# EAGLE board Magnificent Amur-Borwo (EAGLE 9.7.0)

Size 400.21 x 291.04 mm. Coordinates in mm from the lower left corner, seen from the top.
Outline: 0,0 400.21,0 400.21,291.04 0,291.04 0,0
Copper layers (1*16): Top 0.035mm / dielectric 1.5mm / Bottom 0.035mm
Design rules "default": minimum track width 6mil, minimum drill 0.35mm, track to track 6mil, track to pad 6mil, pad to pad 6mil, via to via 6mil, smd to smd 6mil, copper to edge 40mil, drill to drill 6mil, minimum pad ring 10mil, minimum via ring 8mil, stop-mask expansion 4mil, vias tented up to drill 0mil, thermal gap 10mil

## Footprints (pad centres in the part's own frame; a part is rotated, then mirrored left to right if it is on the bottom)
BATTERY-GENERIC = drill 1.118 pad 3.15 octagon: + 2.54,0; - -2.54,0
LEDRD254W60D565H860B = drill 0.981 pad 1.581: 1 -1.27,0; 2 1.27,0
LED-RGB-5MM = drill 0.9: B 0.635,0.635; C -0.635,-0.635; G 1.905,-0.635; R -1.905,0.635
LEDRD254W60D565H860B_B = drill 0.981 pad 1.581: 1 -1.27,0; 2 1.27,0
LEDRD254W60D565H860B_G = drill 0.981 pad 1.581: 1 -1.27,0; 2 1.27,0
MOTOR = drill 1.118 pad 3.15 octagon: + 2.54,0; - -2.54,0
PIEZO = drill 1 pad 1.6: 1 -3.5,0; 2 3.5,0
GL5528 = drill 0.8 pad 1.4: 1 -1.702,0; 2 1.702,0
RESAD1016W63L850D250B = drill 0.83 pad 1.43: 1 -5.08,0; 2 5.08,0
HA-06-SM065 = drill 1 pad 1.676: 1 -2.54,-2.54; 2 0,2.54; 3 2.54,-2.54
SWITCH-MOMENTARY-PTH-6.5MM = drill 1.016 pad 1.88: 1 -3.251,2.261; 2 3.251,2.261; 3 -3.251,-2.261; 4 3.251,-2.261
SG90 = drill 1.016 long: 1 -2.54,0; 2 0,0; 3 2.54,0
ARDUINO-UNO-R3-SHIELD = drill 1.016 pad 1.88: 3.3V 24.13,-2.54; 5V 24.13,0; A0 24.13,12.7; A1 24.13,15.24; A2 24.13,17.78; A3 24.13,20.32; A4 24.13,22.86; A5 24.13,25.4; AREF -24.13,-13.97; D2 -24.13,20.32; D3 -24.13,17.78; D4 -24.13,15.24; D5 -24.13,12.7; D6 -24.13,10.16; D7 -24.13,7.62; D8 -24.13,3.81; D9 -24.13,1.27; D10 -24.13,-1.27; D11 -24.13,-3.81; D12 -24.13,-6.35; D13 -24.13,-8.89; GND@0 24.13,2.54; GND@1 24.13,5.08; GND@2 -24.13,-11.43; IOREF 24.13,-7.62; NC 24.13,-10.16; RES 24.13,-5.08; RX -24.13,25.4; SCL -24.13,-19.05; SDA -24.13,-16.51; TX -24.13,22.86; VIN 24.13,7.62
JHD-162A = drill 1.016 long: 1 -19.05,0; 2 -16.51,0; 3 -13.97,0; 4 -11.43,0; 5 -8.89,0; 6 -6.35,0; 7 -3.81,0; 8 -1.27,0; 9 1.27,0; 10 3.81,0; 11 6.35,0; 12 8.89,0; 13 11.43,0; 14 13.97,0; 15 16.51,0; 16 19.05,0
TO92 = drill 0.813 octagon: 1 -1.27,0; 2 0,1.905; 3 1.27,0

## Placement (x,y rotation side)
BAT3  9V  [BATTERY-GENERIC]  272.37,8.26 180 top
D1  RED  [LEDRD254W60D565H860B]  162.94,226.4 180 top
D2  LED-RGBRCBG-PTH  [LED-RGB-5MM]  22.52,283.55 0 top
D3  RED  [LEDRD254W60D565H860B]  9.53,261.25 180 top
D4  BLUE  [LEDRD254W60D565H860B_B]  23.17,260.99 180 top
D5  GREEN  [LEDRD254W60D565H860B_G]  37.09,261.12 180 top
D10  LED-RGBRCBG-PTH  [LED-RGB-5MM]  274.21,57.63 0 top
D11  RED  [LEDRD254W60D565H860B]  261.22,35.33 180 top
D12  BLUE  [LEDRD254W60D565H860B_B]  274.87,35.07 180 top
D13  GREEN  [LEDRD254W60D565H860B_G]  288.78,35.2 180 top
M1  MOTOR_HDR  [MOTOR]  159.8,167.07 0 top
PIEZO1  PIEZO  [PIEZO]  208.07,40.94 180 top
R1  PHOTOCELL_GL5528  [GL5528]  214.82,200.26 330 top
R2  10k  [RESAD1016W63L850D250B]  217.18,184.71 270 top
R4  480  [RESAD1016W63L850D250B]  10.79,256.17 90 top
R5  480  [RESAD1016W63L850D250B]  24.44,255.91 90 top
R6  480  [RESAD1016W63L850D250B]  38.36,256.04 90 top
R7  480  [RESAD1016W63L850D250B]  21.25,278.47 90 top
R8  220  [RESAD1016W63L850D250B]  362.18,145.45 90 top
R9  220  [RESAD1016W63L850D250B]  196.02,219.71 90 top
R14  220  [RESAD1016W63L850D250B]  182.85,60.89 90 top
R15  220  [RESAD1016W63L850D250B]  198.04,61.75 90 top
R16  220  [RESAD1016W63L850D250B]  202.95,62.1 90 top
R17  480  [RESAD1016W63L850D250B]  262.49,30.25 90 top
R18  480  [RESAD1016W63L850D250B]  276.14,29.99 90 top
R19  480  [RESAD1016W63L850D250B]  290.05,30.12 90 top
R20  480  [RESAD1016W63L850D250B]  272.94,52.55 90 top
RPOT1  250k  [HA-06-SM065]  329.96,177.46 0 top
RPOT3  250k  [HA-06-SM065]  279.33,98.61 0 top
S1  SWITCH_MOMENTARY  [SWITCH-MOMENTARY-PTH-6.5MM]  8.26,247.28 90 top
S2  SWITCH_MOMENTARY  [SWITCH-MOMENTARY-PTH-6.5MM]  21.9,247.02 90 top
S3  SWITCH_MOMENTARY  [SWITCH-MOMENTARY-PTH-6.5MM]  35.82,247.15 90 top
S7  SWITCH_MOMENTARY  [SWITCH-MOMENTARY-PTH-6.5MM]  259.95,21.36 90 top
S8  SWITCH_MOMENTARY  [SWITCH-MOMENTARY-PTH-6.5MM]  273.6,21.1 90 top
S9  SWITCH_MOMENTARY  [SWITCH-MOMENTARY-PTH-6.5MM]  287.51,21.23 90 top
SERVO1  SERVOSG90  [SG90]  116.46,197.11 0 top
U1  ARDUINO-UNO-R3-SHIELD  [ARDUINO-UNO-R3-SHIELD]  192.75,111.23 270 top
U2  LCD-16X2JHD-162A  [JHD-162A]  344.58,130.65 0 top
U3  TMP36GT9Z_TO92  [TO92]  183.19,191.83 0 top

## Library data of the parts
BAT3 D2 D10 M1 PIEZO1 R1 R2 R4-R9 R14-R20 RPOT1 RPOT3 S1-S3 S7-S9 SERVO1 U1-U3 = Tinkercad
D1 D3 D11 = Tinkercad; CATEGORY: Opto-Electronic; SUB-CATEGORY: LED; VALUE: LED_RED
D4 D12 = Tinkercad; CATEGORY: Opto-Electronic; SUB-CATEGORY: LED; VALUE: LED_BLUE
D5 D13 = Tinkercad; CATEGORY: Opto-Electronic; SUB-CATEGORY: LED; VALUE: LED_GREEN

## Nets
BAT3+: BAT3.+ S7.1 S8.1 S9.1
BAT3-: BAT3.- D11.2 D12.2 D13.2 R20.1
D1_A: D1.1 R9.2
D2_C: D2.C R7.2
D3_A: D3.1 R4.2
D4_A: D4.1 R5.2
D5_A: D5.1 R6.2
D5_C: D3.2 D4.2 D5.2 R7.1
D11_A: D11.1 R17.2
D12_A: D12.1 R18.2
D13_A: D13.1 R19.2
S1_3: D2.R R4.1 S1.3 S1.4
S2_1: S1.1 S2.1 S3.1
S2_3: D2.B R5.1 S2.3 S2.4
S3_3: D2.G R6.1 S3.3 S3.4
S7_3: D10.R R16.1 R17.1 S7.3 S7.4
S8_3: D10.B R14.1 R18.1 S8.3 S8.4
S9_3: D10.G R15.1 R19.1 S9.3 S9.4
U1_5V: R1.1 R8.2 RPOT1.1 RPOT3.1 SERVO1.2 U1.5V U2.2 U3.3
U1_A0: U1.A0 U3.2
U1_A1: R1.2 R2.1 U1.A1
U1_A2: RPOT3.2 U1.A2
U1_A3: PIEZO1.1 U1.A3
U1_D2: U1.D2 U2.14
U1_D3: U1.D3 U2.13
U1_D4: U1.D4 U2.12
U1_D5: U1.D5 U2.11
U1_D6: R16.2 U1.D6
U1_D7: R15.2 U1.D7
U1_D8: R9.1 U1.D8
U1_D9: M1.- U1.D9
U1_D10: SERVO1.3 U1.D10
U1_D11: U1.D11 U2.6
U1_D12: U1.D12 U2.4
U1_D13: R14.2 U1.D13
U1_GND: D1.2 D10.C M1.+ PIEZO1.2 R2.2 R20.2 RPOT1.3 RPOT3.3 SERVO1.1 U1.GND@0 U1.GND@1 U1.GND@2 U2.1 U2.5 U2.16 U3.1
U2_LED+: R8.1 U2.15
U2_VO: RPOT1.2 U2.3

## Tracks (layer width: path | path; a pad name or v marks a point on that pad's centre or on a via)
BAT3+  (3 unrouted)
BAT3-  (4 unrouted)
D1_A  (1 unrouted)
D2_C  (1 unrouted)
D3_A  (1 unrouted)
D4_A  (1 unrouted)
D5_A  (1 unrouted)
D5_C  (3 unrouted)
D11_A  (1 unrouted)
D12_A  (1 unrouted)
D13_A  (1 unrouted)
S1_3  (3 unrouted)
S2_1  (2 unrouted)
S2_3  (3 unrouted)
S3_3  (3 unrouted)
S7_3  (4 unrouted)
S8_3  (4 unrouted)
S9_3  (4 unrouted)
U1_5V  (7 unrouted)
U1_A0  (1 unrouted)
U1_A1  (2 unrouted)
U1_A2  (1 unrouted)
U1_A3  (1 unrouted)
U1_D2  (1 unrouted)
U1_D3  (1 unrouted)
U1_D4  (1 unrouted)
U1_D5  (1 unrouted)
U1_D6  (1 unrouted)
U1_D7  (1 unrouted)
U1_D8  (1 unrouted)
U1_D9  (1 unrouted)
U1_D10  (1 unrouted)
U1_D11  (1 unrouted)
U1_D12  (1 unrouted)
U1_D13  (1 unrouted)
U1_GND  (15 unrouted)
U2_LED+  (1 unrouted)
U2_VO  (1 unrouted)